# Altium PCB pcbgyr.PcbDoc
Units mm, origin at the board's own origin, x right, y up, seen from the top; angles counter-clockwise.
Board outline 50 x 50 mm, 2 copper layers (Top Layer, Bottom Layer); 29 components, 19 nets, 75 pads, 16 vias.
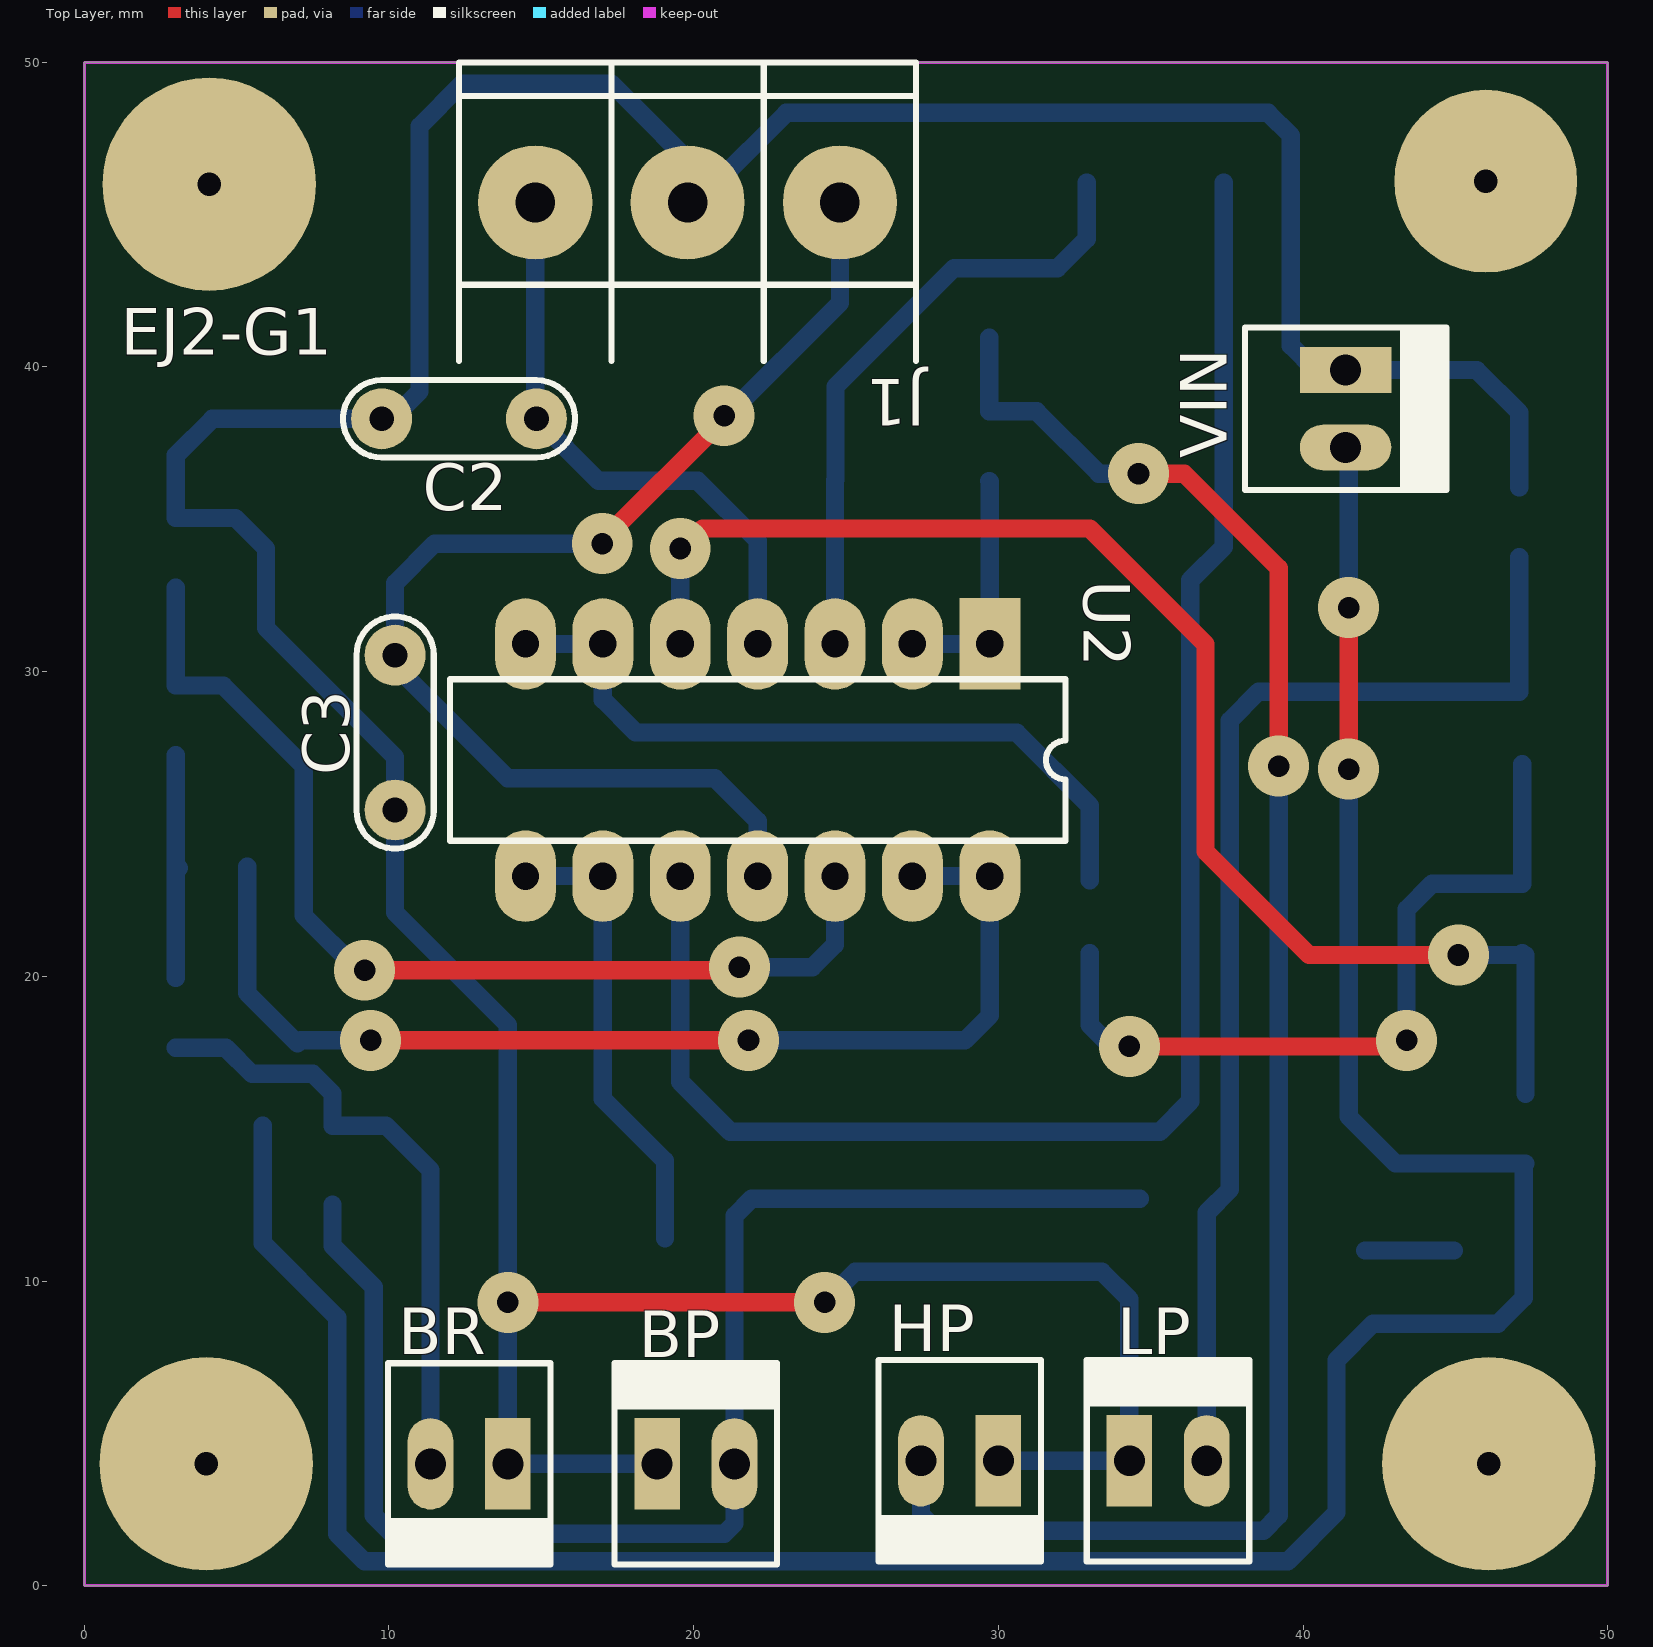
[diagram p0: Top Layer view]
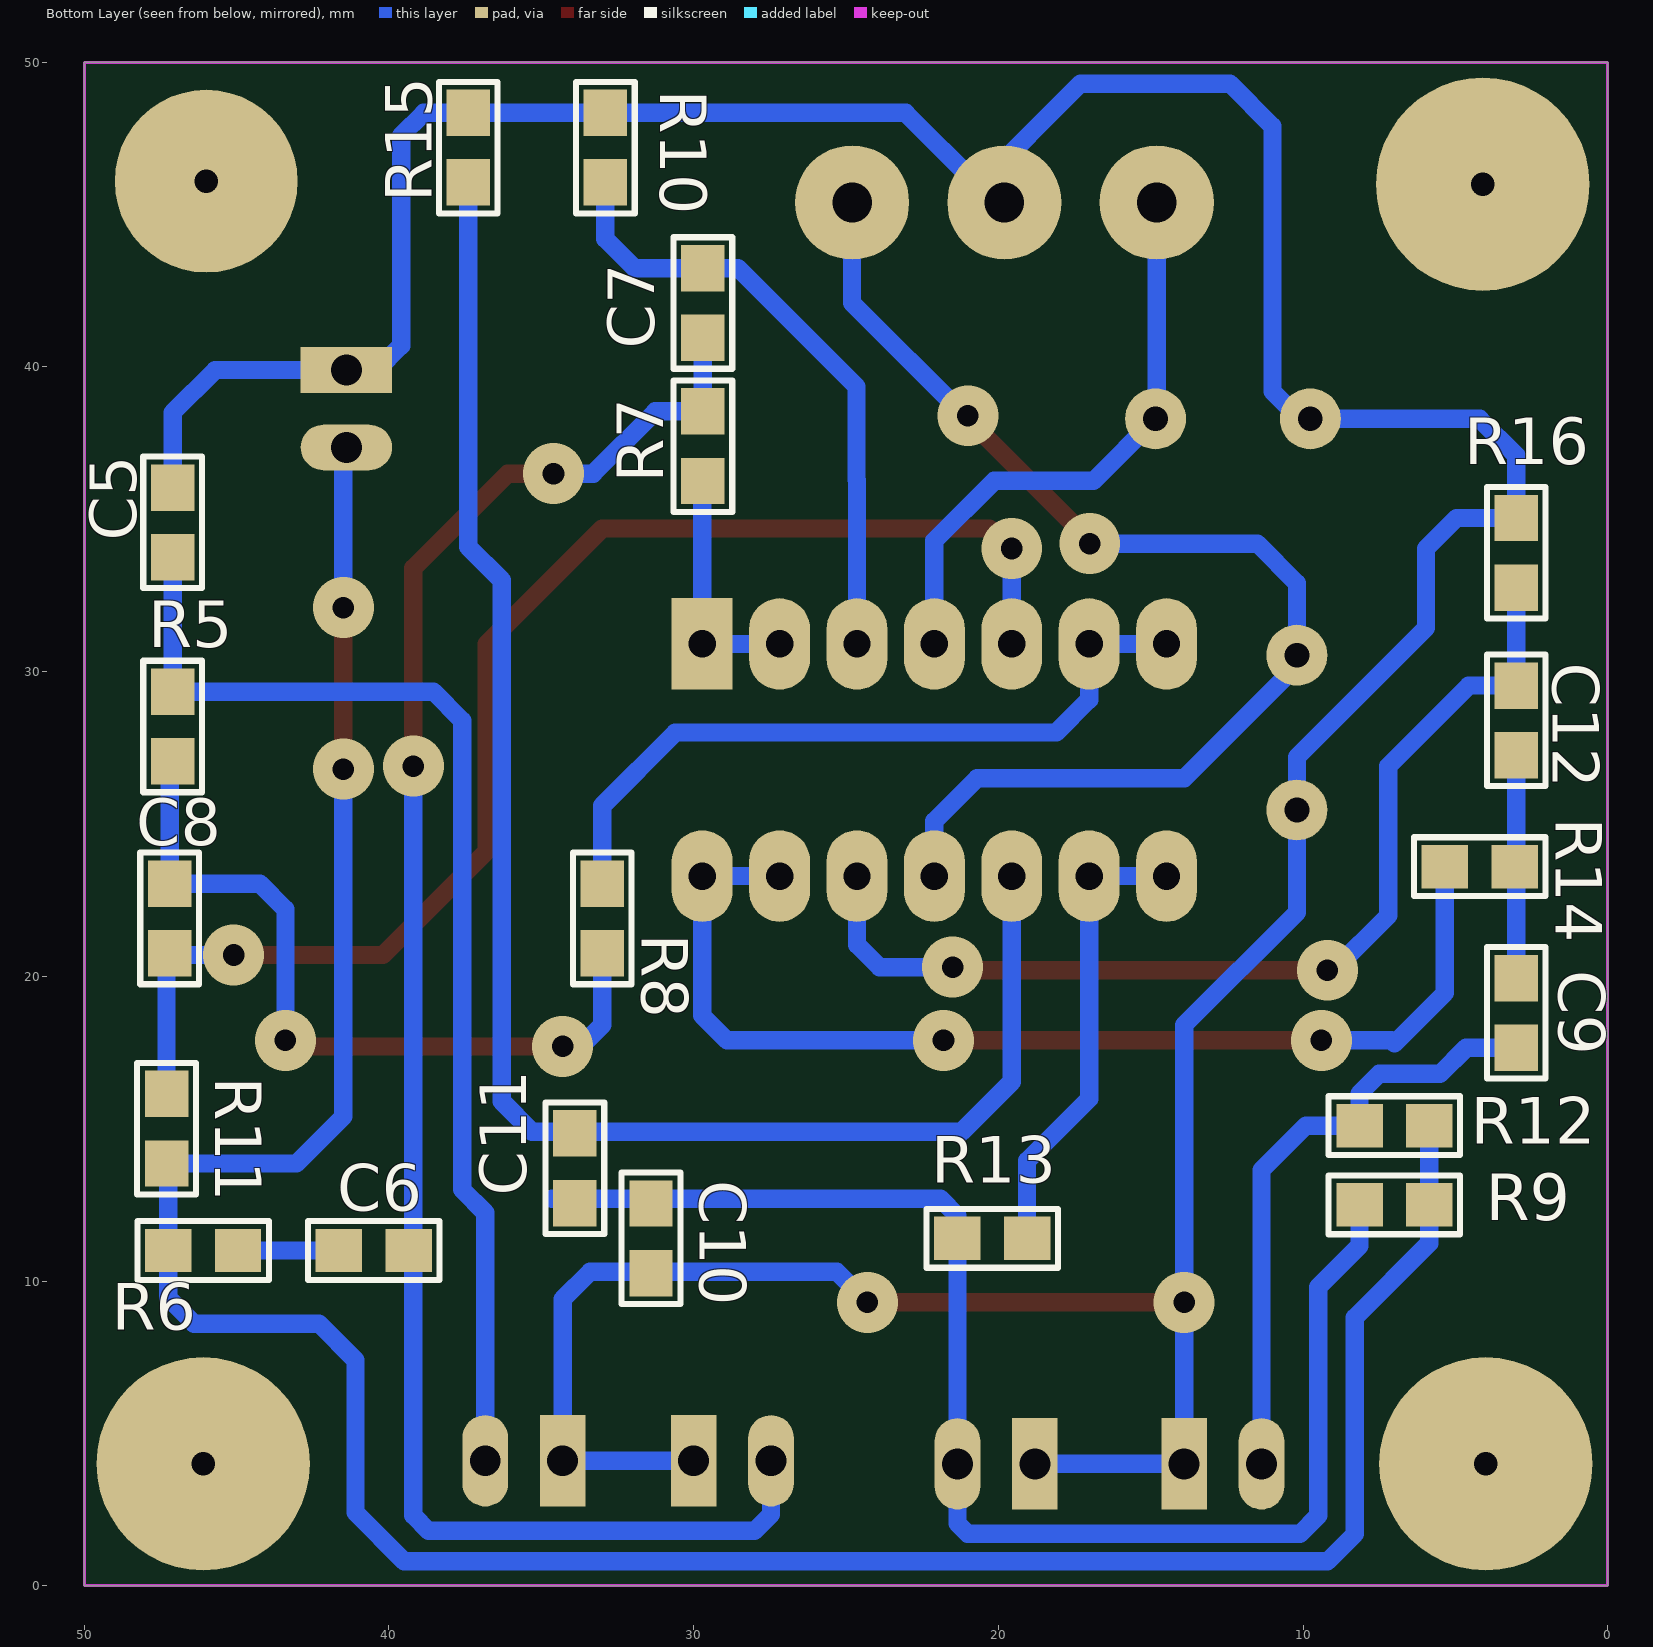
[diagram p1: Bottom Layer view, seen from below]
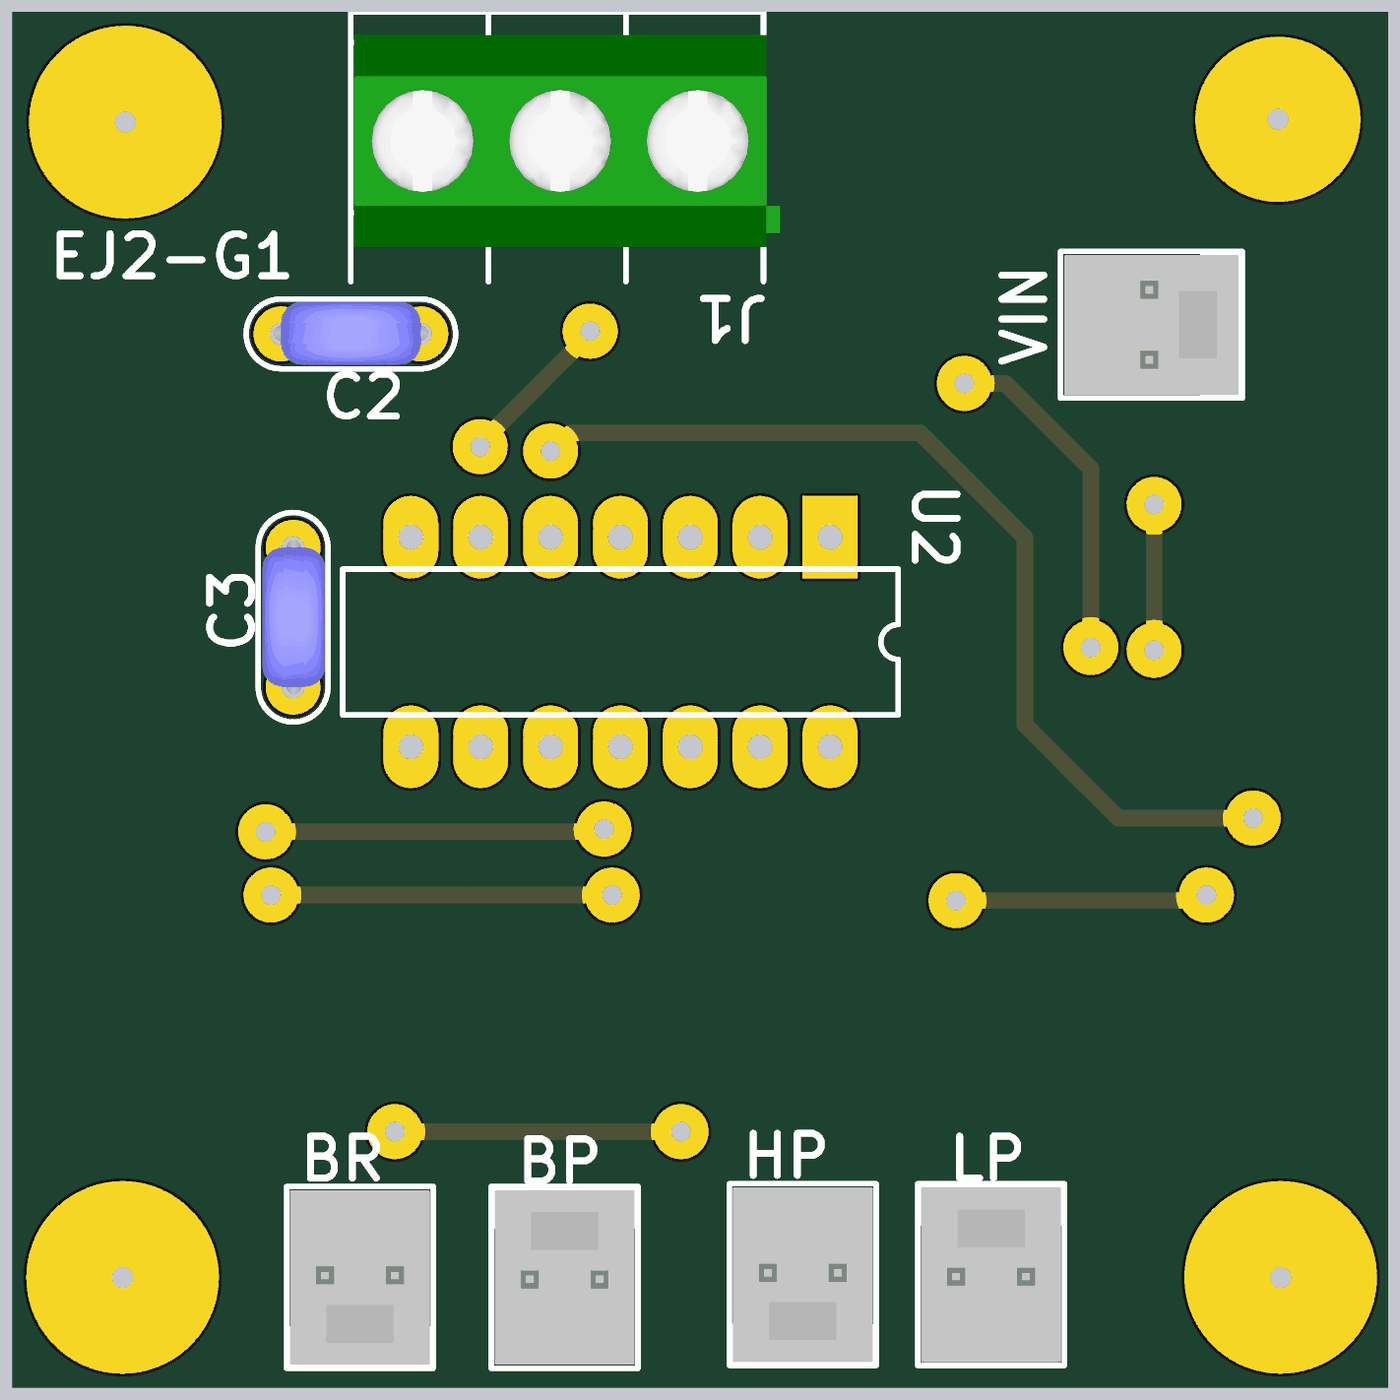
[diagram p2: 3D render of the assembled board from above, using the file's embedded part models]
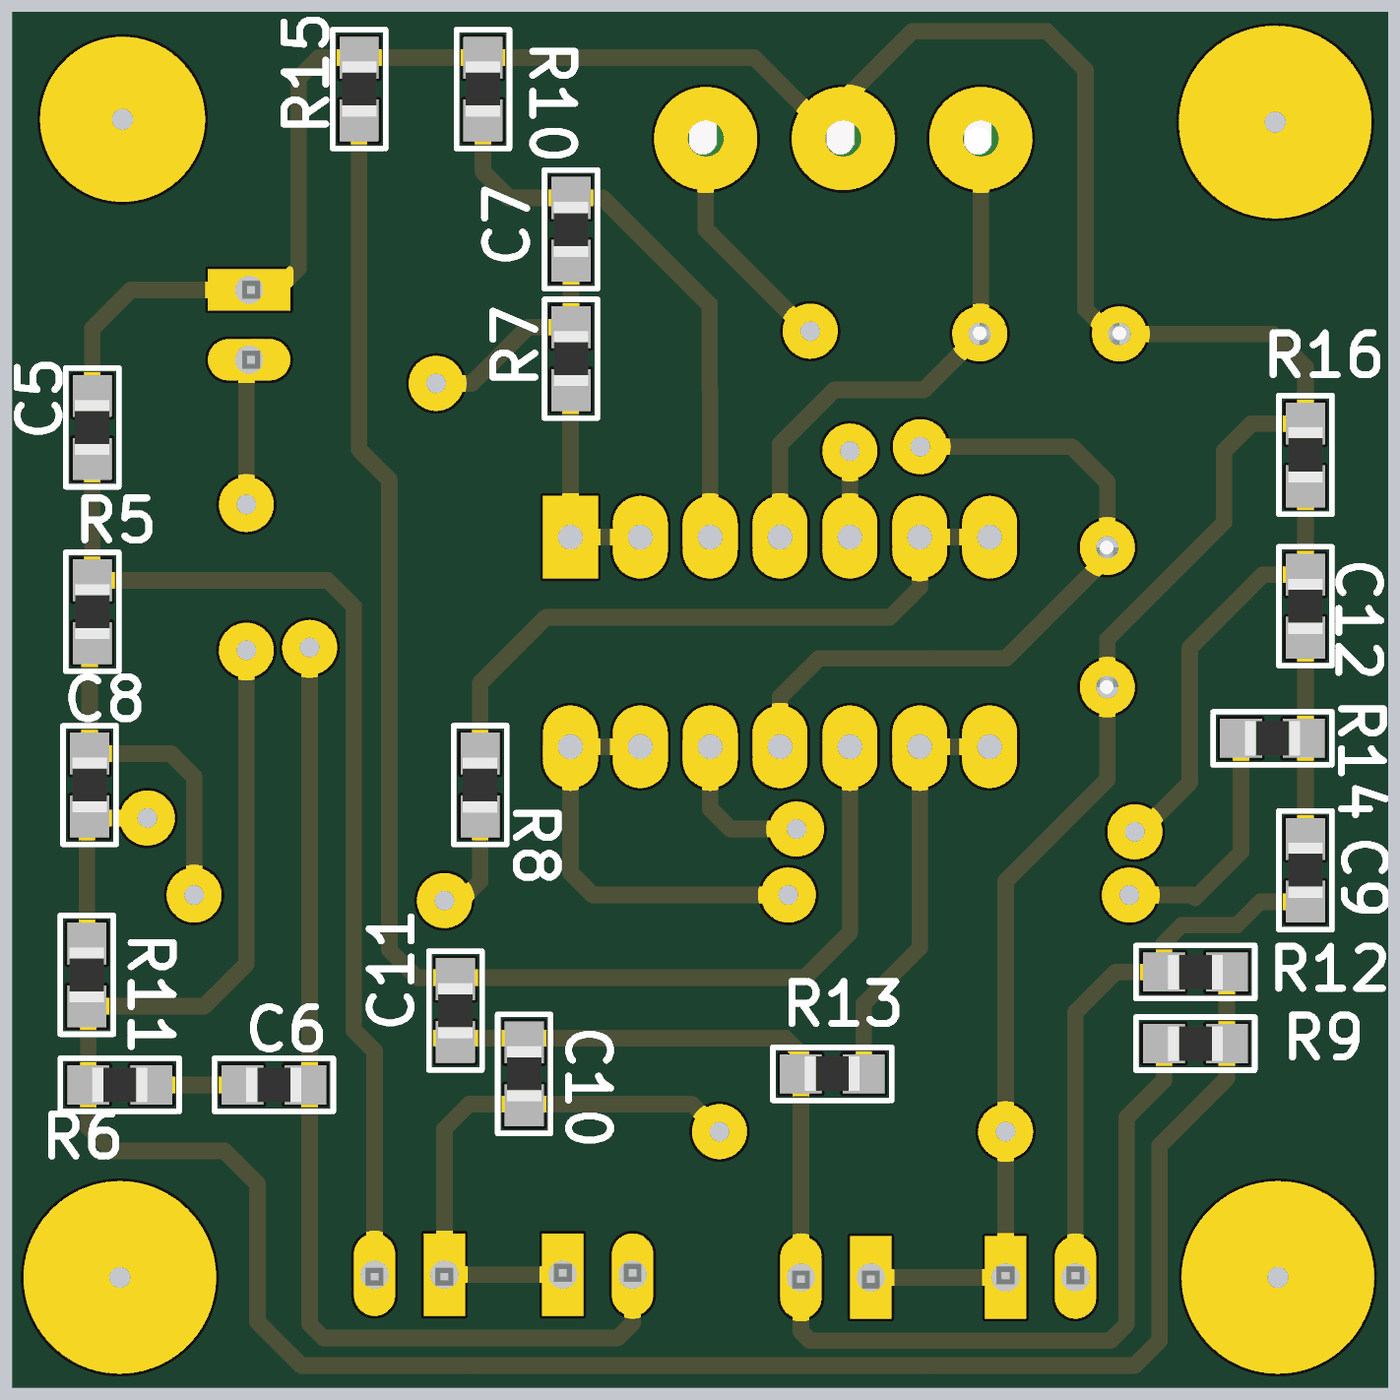
[diagram p3: 3D render of the assembled board from below, using the file's embedded part models]

## Layer stack, top to bottom
Top Solder: solder mask 0.0102, Solder Resist, Dk 3.5
Top Layer: signal copper 0.0356
Dielectric 1: dielectric 0.32, FR-4, Dk 4.8
Bottom Layer: signal copper 0.0356
Bottom Solder: solder mask 0.0102, Solder Resist, Dk 3.5

## Board outline
0,0 0,50 50,50 50,0 0,0

## Design rules (kind name [scope] priority, off if disabled: settings)
Clearance [All] p1: gap=0.3
PolygonConnect [All] p1: connectstyle=Relief reliefconductorwidth=0.254 reliefentries=4 polygonreliefangle="90 Angle" airgapwidth=0.254
RoutingVias [All] p1: holewidth=0.4 width=2 viastyle="Through Hole" minholewidth=0.4 minwidth=2 maxholewidth=0.4 maxwidth=2
SolderMaskExpansion [All] p1: expansion=0.102
Width [All] p1: maxlimit=0.6 minlimit=0.6 preferedwidth=0.6
30 further rules are at their usual default settings.

## Components (designator, comment, footprint, x,y, rotation, side; value= is the part's Value field where it differs from the comment)
BP "MOLEX2" MOLEX2 18.8,4 r0 top
BR "MOLEX2" MOLEX2 13.9,4 r180 top
C2 "0.1u" CAP200 12.3,38.3 r180 top
C3 "0.1u" CAP200 10.2,28 r90 top
C5 "2.2n" 0805 47.1,34.9 r90 bottom
C6 "560n" 0805 40.5,11 r180 bottom
C7 "680p" 0805 29.7,42.1 r90 bottom
C8 "10nf" 0805 47.2,21.9 r270 bottom
C9 "470n" 0805 3,18.8 r270 bottom
C10 "5.6n" 0805 31.4,11.4 r270 bottom
C11 "470p" 0805 33.9,13.7 r90 bottom
C12 "1nf" 0805 3,28.4 r90 bottom
HP "MOLEX2" MOLEX2 30,4.1 r180 top
J1 "BORNERA 3" BORNERA3 19.8,45.4 r270 top
LP "MOLEX2" MOLEX2 34.3,4.1 r0 top
R5 "12k" 0805 47.1,28.2 r270 bottom
R6 "620" 0805 46.1,11 r180 bottom
R7 "100" 0805 29.7,37.4 r270 bottom
R8 "47" 0805 33,21.9 r90 bottom
R9 "1k" 0805 7,12.5 r0 bottom
R10 "510k" 0805 32.9,47.2 r270 bottom
R11 "200k" 0805 47.3,15 r90 bottom
R12 "1k" 0805 7,15.1 r0 bottom
R13 "100" 0805 20.2,11.4 r180 bottom
R14 "100" 0805 4.2,23.6 r0 bottom
R15 "510k" 0805 37.4,47.2 r270 bottom
R16 "510k" 0805 3,33.9 r270 bottom
U2 "TL084J" J014 22.1,27.1 r180 top
VIN "MOLEX2" MOLEX2 41.4,39.9 r270 top (schematic designator SIGNAL_IN)

## Footprints (in the part's own frame and the unit in brackets; to place one, negate y for a bottom-side part, rotate by r counter-clockwise, add the part's x,y. Pads: shape width x height; smd on the part's side, far side on the other; paste and mask are expansions set on the pad)
0805 [mil] "Pasivo 0805"
  rect 60x56 smd: 1(-45,0) 2(45,0)
  silkscreen extent -85,-38 85,38, body extent -39,-24 39,25, height 15
BORNERA3 [mm] "Bornera con Tornillos 5mm separación"
  round 3.75 hole 1.3: 1(0,5) 2(0,0) 3(0,-5)
  silkscreen extent -4.6,-7.5 5.2,7.5, body extent -3.76,-7.39 3.94,8.11, height 10.05
CAP200 [mm]
  round 2 hole 0.813: 1(-2.54,0) 2(2.54,0)
  silkscreen extent -3.81,-1.27 3.81,1.27, body extent -2.79,-1.17 2.79,1.12, height 6.24
J014 [mm] "DIP; 14 Leads; Row Spacing 7.62 mm; Pitch 2.54 mm"
  rect 2x3 hole 0.9: 1(-7.62,-3.81)
  oval 2x3 hole 0.9: 2(-5.08,-3.81) 3(-2.54,-3.81) 4(0,-3.81) 5(2.54,-3.81) 6(5.08,-3.81) 7(7.62,-3.81) 8(7.62,3.81) 9(5.08,3.81) 10(2.54,3.81) 11(0,3.81) 12(-2.54,3.81) 13(-5.08,3.81) 14(-7.62,3.81)
  silkscreen extent -10.1,-2.65 10.1,2.65
MOLEX2 [mm]
  rect 1.5x3 hole 1.016: 1(0,0)
  oval 1.5x3 hole 1.016: 2(2.54,0)
  silkscreen extent -1.4,-3.3 3.94,3.3, body extent -1.27,-3.17 3.81,3.17, height 10.74

## Part data
C2 C3 C5 C6 C7 C8 C9 C10 C11 C12: library part CAP
R5 R6 R7 R8 R9 R10 R11 R12 R13 R14 R15 R16: library part RES
U2: "JFET-Input Operational Amplifier"

## Free pads (board coordinates)
  round 7 hole 0.762: 1(4,4) 1(4.1,46) 1(46.1,4)
  round 6 hole 0.762: 1(46,46.1)

## Via types
v1: diameter 2, hole 0.711, Top Layer to Bottom Layer, 16 vias

## Nets (pads, with @x,y where several pads share a name; then routed paths per layer and width w, separated by ;. In a path a pad name is that pad's centre, name@x,y a point inside that pad or via, vN(x,y) a via of type N, cw(c..) or ccw(c..) an arc to the next point about the centre after c; other vN are vias at no path point)
+VCC: C2.1 J1.3 U2.4 | length 19.4
  Bottom Layer w0.6: J1.3 14.8,38.34 16.875,36.265 20.135,36.265 22.1,34.3 U2.4
-VCC: C3.2 J1.1 U2.11 | length 40.4
  Top Layer w0.6: v1(17,34.2) 17,34.3 21,38.3 v1(21,38.4)
  Bottom Layer w0.6: v1(17,34.2) 11.5,34.2 10.2,32.9 10.2,30.2 13.9,26.5 20.7,26.5 22.1,25.1 U2.11 ; v1(21,38.4) 21.1,38.4 24.8,42.1 J1.1
BP: BP.2 C10.1 C11.1 R9.2 R13.1 | length 46.6
  Bottom Layer w0.6: R9.2 8.143,11.157 9.5,9.8 9.5,2.3 10.1,1.7 21,1.7 21.34,2.04 BP.2 21.34,12.14 21.9,12.7 34.643,12.7
BR: BR.2 C9.2 R12.2 | length 20.3
  Bottom Layer w0.6: C9.2 4.643,17.657 5.5,16.8 7.5,16.8 8.143,16.157 R12.2 9.9,15.1 11.36,13.64 BR.2
GND: BP.1 BR.1 C2.2 C3.1 C5.2 C10.2 HP.1 J1.2 LP.1 R10.1 R15.1 R16.1 VIN.1 | length 141.7
  Top Layer w0.6: v1(13.9,9.3) 14,9.2 14.1,9.3 v1(24.3,9.3)
  Bottom Layer w0.6: C2.2 4.2,38.3 3,37.1 R16.1 4.957,35.043 5.96,34.04 5.96,31.44 10.2,27.2 10.2,22.1 13.9,18.4 v1(13.9,9.3) BR.1 BP.1 ; C2.2 10.1,38.3 11,39.2 11,47.9 12.4,49.3 17.3,49.3 20.65,45.95 23.043,48.343 R10.1 R15.1 38.857,48.343 39.6,47.6 39.6,40.7 40.4,39.9 45.7,39.9 47.1,38.5 C5.2 ; v1(24.3,9.3) 25.3,10.3 33.4,10.3 34.3,9.4 LP.1 HP.1
HP: C6.2 C7.1 HP.2 R7.1 | length 59.6
  Top Layer w0.6: v1(34.6,36.5) 36.1,36.5 39.2,33.4 v1(39.2,26.9)
  Bottom Layer w0.6: HP.2 27.46,2.34 28,1.8 38.7,1.8 39.2,2.3 39.2,26.6 v1@39.6,27 ; C7.1 R7.1 31.257,38.543 33.3,36.5 v1(34.6,36.5) ; v1(39.2,26.9) v1@39.5,26.9
NetC5_1: C5.1 LP.2 R5.1 | length 38.9
  Bottom Layer w0.6: LP.2 36.84,12.24 37.6,13 37.6,26.237 37.6,28.4 38.543,29.343 R5.1 C5.1
NetC6_1: C6.1 R6.2 | length 2.9
  Bottom Layer w0.6: C6.1@42.043,11 R6.2
NetC7_2: C7.2 R10.2 U2.3 | length 20.6
  Bottom Layer w0.6: U2.3 24.64,36.283 24.657,36.3 24.657,39.357 28.543,43.243 29.9,43.243 31.943,43.243 32.9,44.2 R10.2
NetC8_1: C8.1 R5.2 R8.1 | length 26
  Top Layer w0.6: v1(34.3,17.7) 43.1,17.7 v1@43.4,18
  Bottom Layer w0.6: R8.1 33,18.4 33.9,17.5 34.3,17.9 v1(34.3,17.7) ; v1(43.4,17.9) 43.4,22.2 44.243,23.043 C8.1 R5.2@47.2,26.957
NetC8_2: C8.2 R11.2 U2.5 | length 45.6
  Top Layer w0.6: v1(19.56,34.04) 19.6,34 20.3,34.7 33,34.7 36.8,30.9 36.8,24.1 40.2,20.7 v1(45.1,20.7)
  Bottom Layer w0.6: U2.5 v1(19.56,34.04) ; v1(45.1,20.7) C8.2@47.3,20.7 ; C8.2 47.3,20.657 R11.2
NetC9_1: C9.1 C12.1 R14.1 | length 7.3
  Bottom Layer w0.6: C9.1 3,23.543 R14.1 R14.1@3.1,23.557 ; R14.1@3,23.657 C12.1
NetC11_2: C11.2 R15.2 U2.10 | length 55.2
  Bottom Layer w0.6: U2.10 19.56,16.54 21.2,14.9 35.3,14.9 36.3,15.9 36.3,33 37.4,34.1 37.4,43.3 R15.2
NetC12_2: C12.2 R16.2 U2.12 | length 35.6
  Top Layer w0.6: v1(9.2,20.2) 21.1,20.2 21.5,19.8 v1(21.5,20.3)
  Bottom Layer w0.6: R16.2 C12.2 4.557,29.543 7.2,26.9 7.2,22 9,20.2 v1(9.2,20.2) ; v1@22.3,20.3 v1(21.5,20.3) 23.9,20.3 24.64,21.04 U2.12
NetR6_1: R6.1 R9.1 R11.1 R12.1 VIN.2 | length 93.1
  Top Layer w0.6: v1(41.5,26.8) v1(41.5,32.1)
  Bottom Layer w0.6: R12.1 5.857,11.243 8.3,8.8 8.3,1.7 9.2,0.8 39.5,0.8 41.1,2.4 41.1,7.4 42.3,8.6 46.4,8.6 47.243,9.443 47.243,13.8 R11.1 43.043,13.857 41.5,15.4 v1(41.5,26.8) ; VIN.2 41.5,37.26 v1(41.5,32.1)
NetR7_2: R7.2 U2.1 U2.2 | length 7.9
  Bottom Layer w0.6: U2.2 U2.1 29.72,36.237 R7.2
NetR8_2: R8.2 U2.6 U2.7 | length 24
  Bottom Layer w0.6: U2.7 U2.6@16.797,30.91 ; U2.6 17.02,29.08 18.1,28 29.9,28 30.6,28 33,25.6 R8.2@33,23.157
NetR13_2: R13.2 U2.8 U2.9 | length 15.3
  Bottom Layer w0.6: U2.8 U2.9 17.02,15.98 19.057,13.943 R13.2
NetR14_2: R14.2 U2.13 U2.14 | length 37
  Top Layer w0.6: v1(9.4,17.9) 21,17.9 21.2,18.1 21.6,17.7 v1(21.8,17.9)
  Bottom Layer w0.6: R14.2 5.343,19.457 7,17.8 7.1,17.9 v1(9.4,17.9) ; v1(21.8,17.9) 28.9,17.9 29.72,18.72 U2.14 U2.13

## Keep-outs
Keep-Out Layer:
  the board outline again, w0.1

## Silkscreen, mask and mechanical layers (free items; w line width, h text height)
Top Overlay:
  text "EJ2-G1" at 1.2,40.4 h1.52